# EAGLE board 190_Final.preroute (EAGLE 7.5.0)
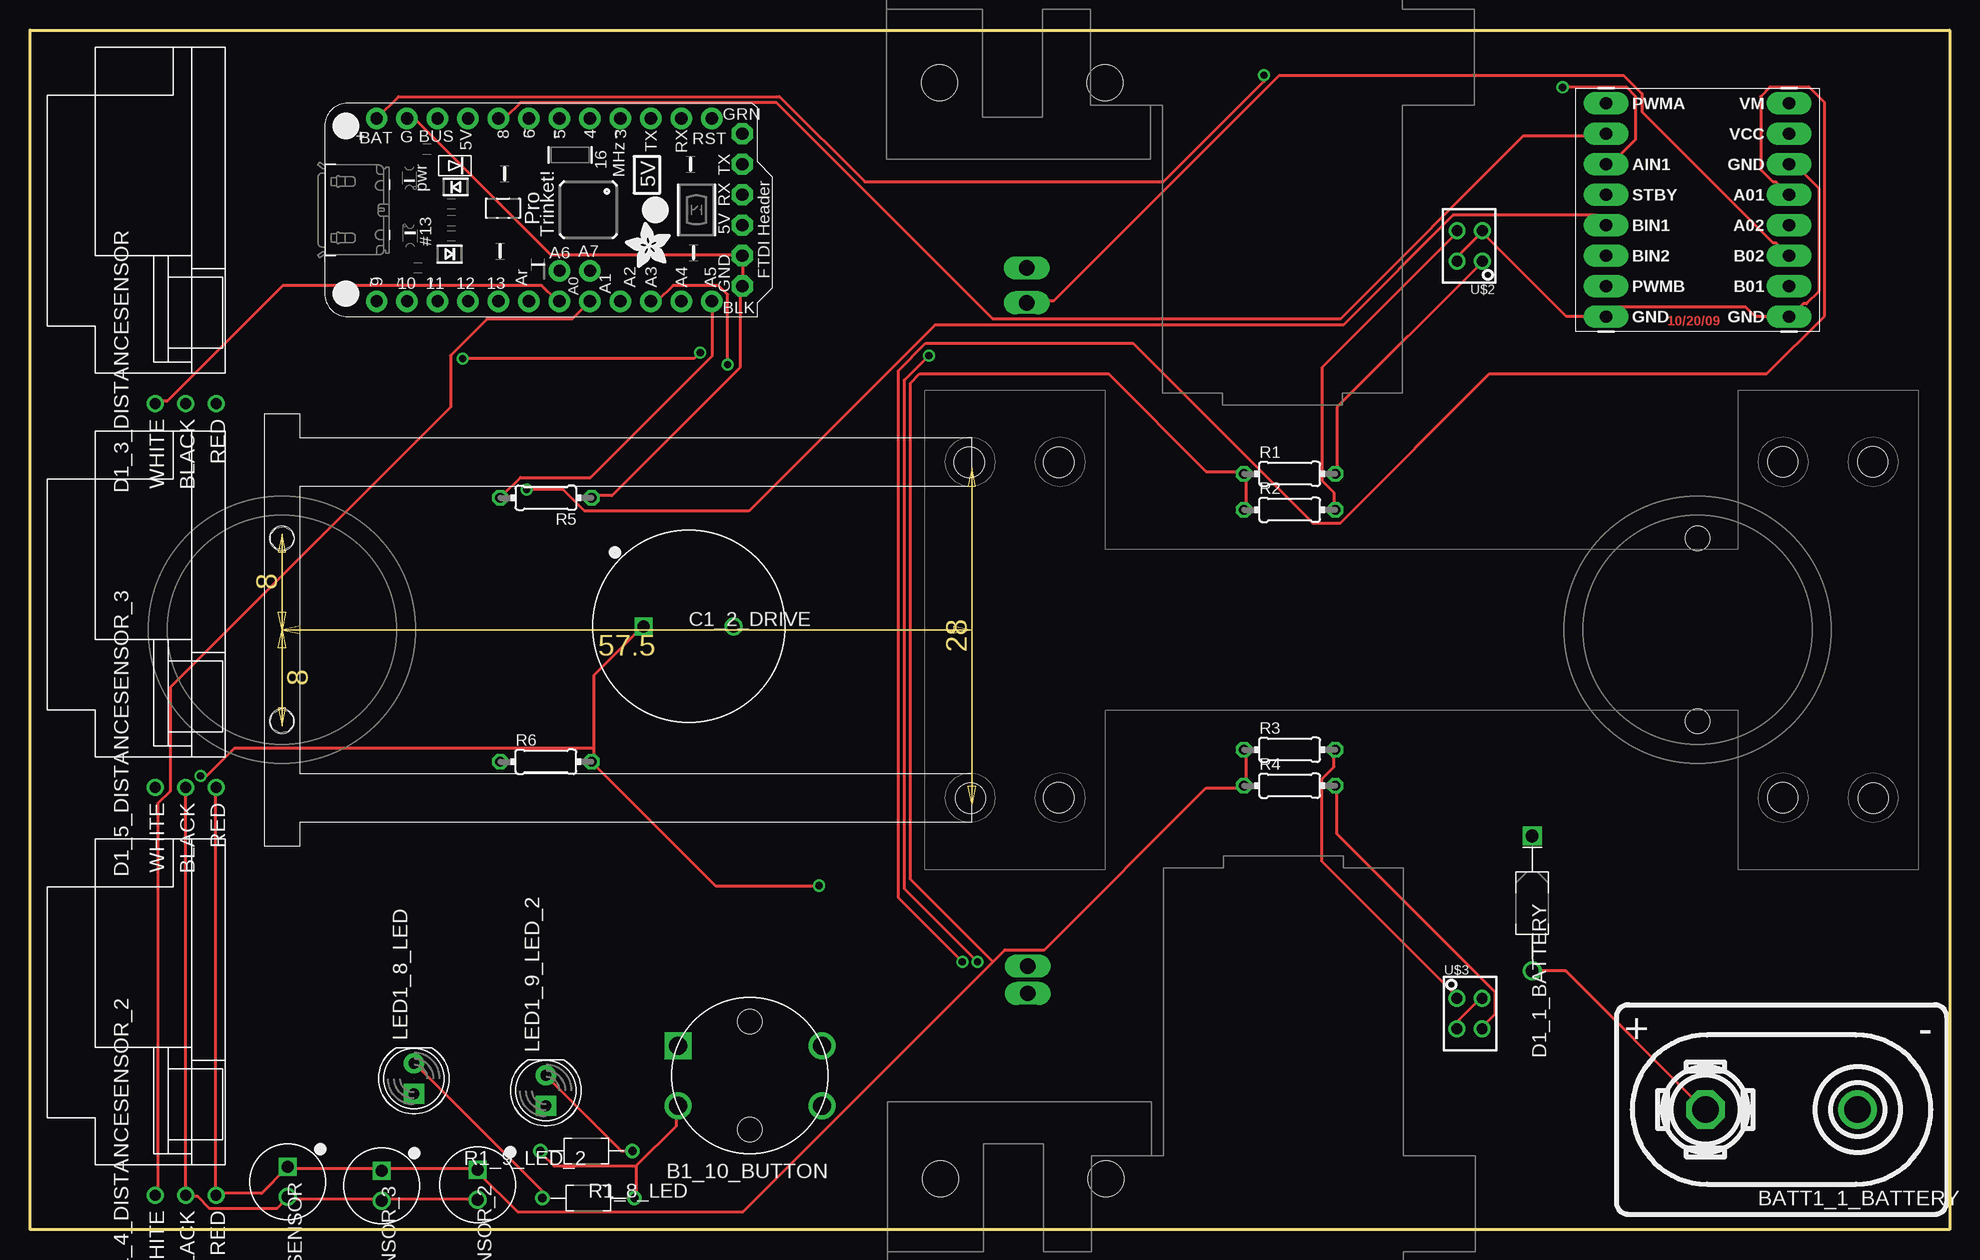
[diagram p0: board, top side]
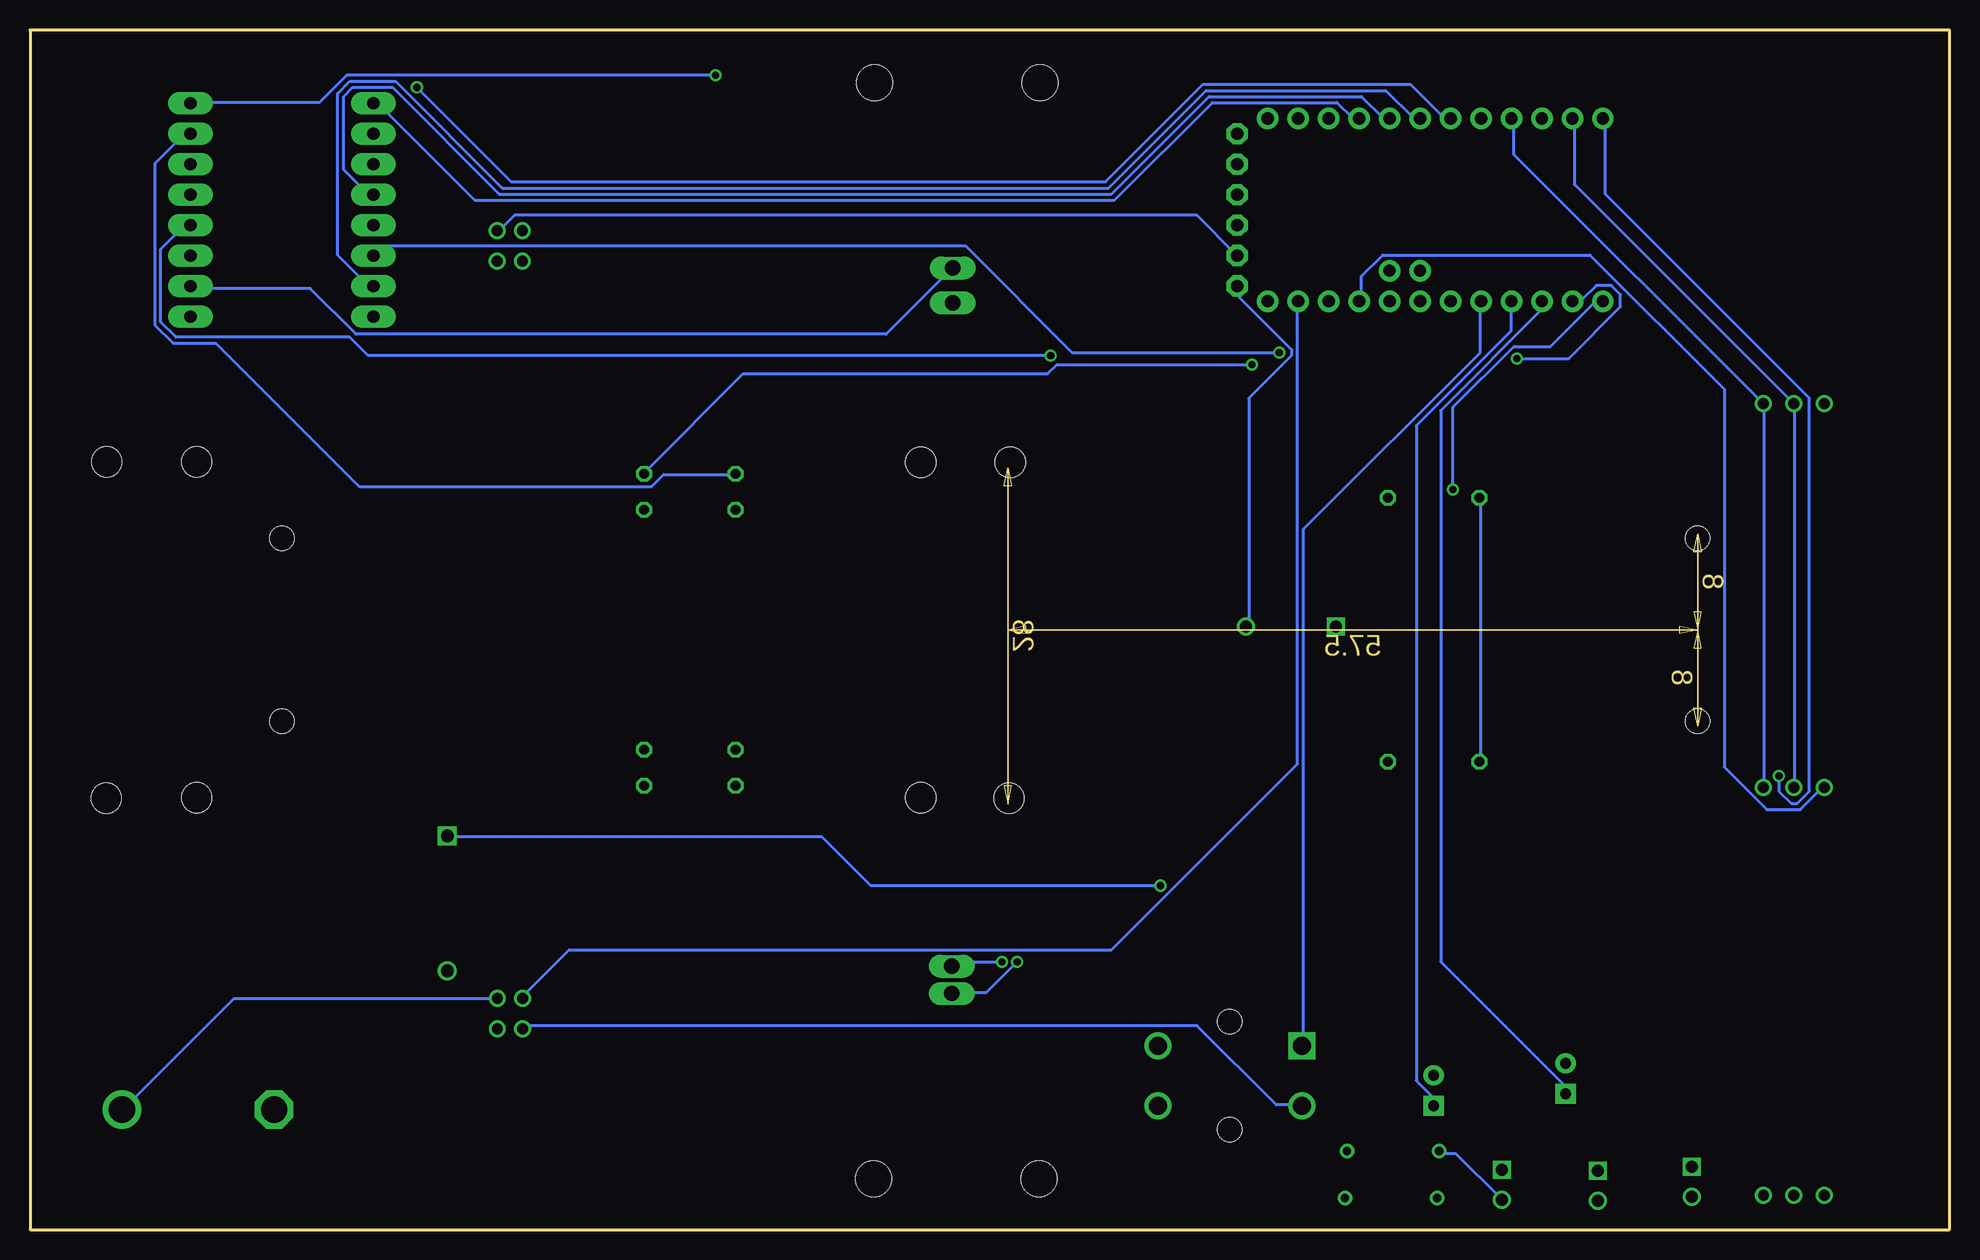
[diagram p1: board, bottom side, seen from below]

Size 160 x 100 mm. Coordinates in mm from the lower left corner, seen from the top.
Outline: 0,0 0,100 160,100 160,0 0,0
Copper layers (1*16): Top 0.035mm / dielectric 1.5mm / Bottom 0.035mm
Design rules "default *": minimum track width 10mil, minimum drill 0.6mm, track to track 10mil, track to pad 10mil, pad to pad 10mil, via to via 10mil, smd to smd 8mil, copper to edge 40mil, drill to drill 15mil, minimum pad ring 10mil, minimum via ring 8mil, stop-mask expansion 4mil, vias tented up to drill 0mil, thermal gap 10mil

## Footprints (pad centres in the part's own frame; a part is rotated, then mirrored left to right if it is on the bottom)
BUTTON-TACTILE-ROUND-ADAFRUIT1009 = drill 1.5 square: P -6,2.5 | drill 1.5: P2 6,2.5; S -6,-2.5; S2 6,-2.5 | hole 2: 0,-4.5; 0,4.5
BATTERY_9V_KEYSTONE_968 = drill 2.2: N 6.35,0 | drill 2.2 octagon: P -6.35,0
CAPPRD750W80D1600H2200P = drill 1 pad 1.5 square: 1 -3.75,0 | drill 1 pad 1.5: 2 3.75,0
CAPPRD250W80D630H1220P = drill 1 pad 1.5 square: 1 -1.25,0 | drill 1 pad 1.5: 2 1.25,0
DIOAD1125W78L520D270_HS = drill 1.06 pad 1.59: A 5.625,0 | drill 1.06 pad 1.59 square: C -5.625,0
ANALOG_DISTANCE_SENSOR_GLUE_MOUNT = drill 0.9: GND -2.54,0.508; VCC -2.54,-2.032; VO -2.54,3.048
SPARKFUN_DUAL_MOTOR_DRIVER = drill 1.016 pad 1.88 long: A01 7.62,1.27; A02 7.62,-1.27; AIN1 -7.62,3.81; AIN2 -7.62,6.35; B01 7.62,-6.35; B02 7.62,-3.81; BIN1 -7.62,-1.27; BIN2 -7.62,-3.81; GND -7.62,-8.89; GND1 7.62,3.81; GND2 7.62,-8.89; PWMA -7.62,8.89; PWMB -7.62,-6.35; STBY -7.62,1.27; VCC 7.62,6.35; VM 7.62,8.89
SOLARBOTICS_G2_LEFT = drill 1.27 long: + -40.545,-3.68; - -43.45,-3.68 | hole 3: -25.1,-10.2; -25.1,3.6
LED5MM = drill 0.9 pad 1.676 square: A -1.27,0 | drill 0.9 pad 1.676: K 1.27,0
0204/7 = drill 0.813 octagon: 1 -3.81,0; 2 3.81,0
RESAD770W45L370D210_HS = drill 0.7 pad 1.1: 1 -3.85,0; 2 3.85,0
SOLARBOTICS_G2 = drill 1.27 long: + 40.545,-3.68; - 42.815,-3.68 | hole 3: 25.1,-10.2; 25.1,3.6
ADAFRUIT-PRO-TRINKET-5V = drill 1.016 pad 1.778: +5V 7.62,24.13; A0 -7.62,16.51; A1 -7.62,13.97; A2 -7.62,11.43; A3 -7.62,8.89; A4 -7.62,6.35; A5 -7.62,3.81; AREF -7.62,19.05; D3 7.62,11.43; D4 7.62,13.97; D5 7.62,16.51; D6 7.62,19.05; D8 7.62,21.59; D9 -7.62,31.75; D10 -7.62,29.21; D11 -7.62,26.67; D12 -7.62,24.13; D13 -7.62,21.59; GND2 7.62,29.21; RESET 7.62,3.81; RXD1 7.62,6.35; TXD1 7.62,8.89; VBAT 7.62,31.75; VBUS1 7.62,26.67 | drill 1 pad 1.778: A6 -5.08,16.51; A7 -5.08,13.97 | drill 1.016 pad 1.778 octagon: DTR/RTS 6.35,1.27; GND -6.35,1.27; GND1 -3.81,1.27; RXD 1.27,1.27; TXD 3.81,1.27; VBUS -1.27,1.27
ADAFRUIT-3/4IN-CASTER = hole 2: -7.62,0; 7.62,0
PHONE_STAND = hole 2.5: -37.7,13.95; -30.25,13.95; -37.6,-14.05; -30.25,-14; 30.1,14; 37.6,14; 30.1,-14; 37.65,-14.05
QRD1114 = drill 0.9: 1 -1.067,1.27; 2 -1.067,-1.27; 3 1.041,-1.27; 4 1.041,1.27

## Placement (x,y rotation side)
B1_10_BUTTON  BUTTON-TACTILE-ROUND  [BUTTON-TACTILE-ROUND-ADAFRUIT1009]  60,12.83 0 top
BATT1_1_BATTERY  BATTERY-9V-VERTICAL  [BATTERY_9V_KEYSTONE_968]  146,10 0 top
C1_2_DRIVE  3300uF  [CAPPRD750W80D1600H2200P]  54.9,50.28 0 top
C1_3_DISTANCESENSOR  100uF  [CAPPRD250W80D630H1220P]  21.49,3.97 270 top
C1_4_DISTANCESENSOR_2  100uF  [CAPPRD250W80D630H1220P]  37.3,3.73 270 top
C1_5_DISTANCESENSOR_3  100uF  [CAPPRD250W80D630H1220P]  29.32,3.65 270 top
D1_1_BATTERY  [DIOAD1125W78L520D270_HS]  125.21,27.19 270 top
D1_3_DISTANCESENSOR  ANALOG_DISTANCE_SENSOR-GLUE  [ANALOG_DISTANCE_SENSOR_GLUE_MOUNT]  13.48,71.39 90 top
D1_4_DISTANCESENSOR_2  ANALOG_DISTANCE_SENSOR-GLUE  [ANALOG_DISTANCE_SENSOR_GLUE_MOUNT]  13.48,5.39 90 top
D1_5_DISTANCESENSOR_3  ANALOG_DISTANCE_SENSOR-GLUE  [ANALOG_DISTANCE_SENSOR_GLUE_MOUNT]  13.48,39.39 90 top
DRVR_2_DRIVE  SPARKFUN_DUAL_MOTOR_DRIVER-BOB  [SPARKFUN_DUAL_MOTOR_DRIVER]  139,85 0 top
L_2_DRIVE  SOLARBOTICS_GM2_LEFT  [SOLARBOTICS_G2_LEFT]  79.41,120.71 90 top
LED1_8_LED  [LED5MM]  32,12.58 90 top
LED1_9_LED_2  [LED5MM]  43,11.58 90 top
R1  [0204/7]  105,63 0 top
R1_8_LED  330  [RESAD770W45L370D210_HS]  46.54,2.62 0 top
R1_9_LED_2  330  [RESAD770W45L370D210_HS]  46.38,6.54 180 top
R2  [0204/7]  105,60 0 top
R3  [0204/7]  105,40 0 top
R4  [0204/7]  105,37 0 top
R5  [0204/7]  43,61 180 top
R6  [0204/7]  43,39 0 top
R_2_DRIVE  SOLARBOTICS_GM2  [SOLARBOTICS_G2]  79.49,-20.86 90 top
U1_0_BRAIN  ADAFRUIT-PRO-TRINKET-5V-BOB  [ADAFRUIT-PRO-TRINKET-5V]  60.64,85 90 top
U1_6_CASTER  CASTERADAFRUIT-3/4IN  [ADAFRUIT-3/4IN-CASTER]  21,50 90 top
U1_7_CASTER_2  CASTERADAFRUIT-3/4IN  [ADAFRUIT-3/4IN-CASTER]  139,50 90 top
U$1  [PHONE_STAND]  116,50 0 top
U$2  QRD1114  [QRD1114]  120,82 180 top
U$3  QRD1114  [QRD1114]  120,18 0 top
U$4  [IRSTAND]  21,50 0 top

## Library data of the parts
B1_10_BUTTON = Components; DIST: Adafruit; DISTPN: 1009; HIERARCHY_NAME: button.B1
BATT1_1_BATTERY = Components; HIERARCHY_NAME: battery.BATT1
C1_2_DRIVE = KoalaBuild; DATASHEET: http://industrial.panasonic.com/www-cgi/jvcr13pz.cgi?E+PZ+3+ABA0012+ECA1EM332+7+WW; DATA_SHEET: http://industrial.panasonic.com/www-cgi/jvcr13pz.cgi?E+PZ+3+ABA0012+ECA1EM332+7+WW; DB: /home/michael/gtron_devel/Gadgets/Tools/Koala/Koala/PartLibrary/Digikey/Capacitors-AluminumTH.csv; DEVICE: TH-RADIAL_ALUMINUM_16MM; DIST: Digikey; DISTPN: P5158-ND; HIERARCHY_NAME: drive.C1; IMAGE: http://media.digikey.com/Photos/Panasonic%20Photos/ECA-1CM472.jpg; MFR: Panasonic Electronic Components; MIN_QTY: 1; MPN: ECA-1EM332; PACKAGE: CAPPRD750W80D1600H2200P; PRICE: $1.13; SIZE: TH; STOCK: STOCK; TOL: 20%; VALUE_QUERY: >3000uF; VOLTS: ( >= 5)V
C1_3_DISTANCESENSOR = KoalaBuild; DATASHEET: http://industrial.panasonic.com/www-cgi/jvcr13pz.cgi?E+PZ+3+ABA0012+ECA1EM101+7+WW; DATA_SHEET: http://industrial.panasonic.com/www-cgi/jvcr13pz.cgi?E+PZ+3+ABA0012+ECA1EM101+7+WW; DB: /home/michael/gtron_devel/Gadgets/Tools/Koala/Koala/PartLibrary/Digikey/Capacitors-AluminumTH.csv; DEVICE: TH-RADIAL_ALUMINUM_6.3MM; DIST: Digikey; DISTPN: P5152-ND; HIERARCHY_NAME: distanceSensor.C1; IMAGE: http://media.digikey.com/Photos/Panasonic%20Photos/ECA-1EM101B.JPG; MFR: Panasonic Electronic Components; MIN_QTY: 1; MPN: ECA-1EM101; PACKAGE: CAPPRD250W80D630H1220P; PRICE: $0.25; SIZE: TH; STOCK: STOCK; TOL: 20%; VALUE_QUERY: >10uF; VOLTS: ( >= 5)V
C1_4_DISTANCESENSOR_2 = KoalaBuild; DATASHEET: http://industrial.panasonic.com/www-cgi/jvcr13pz.cgi?E+PZ+3+ABA0012+ECA1EM101+7+WW; DATA_SHEET: http://industrial.panasonic.com/www-cgi/jvcr13pz.cgi?E+PZ+3+ABA0012+ECA1EM101+7+WW; DB: /home/michael/gtron_devel/Gadgets/Tools/Koala/Koala/PartLibrary/Digikey/Capacitors-AluminumTH.csv; DEVICE: TH-RADIAL_ALUMINUM_6.3MM; DIST: Digikey; DISTPN: P5152-ND; HIERARCHY_NAME: distanceSensor_2.C1; IMAGE: http://media.digikey.com/Photos/Panasonic%20Photos/ECA-1EM101B.JPG; MFR: Panasonic Electronic Components; MIN_QTY: 1; MPN: ECA-1EM101; PACKAGE: CAPPRD250W80D630H1220P; PRICE: $0.25; SIZE: TH; STOCK: STOCK; TOL: 20%; VALUE_QUERY: >10uF; VOLTS: ( >= 5)V
C1_5_DISTANCESENSOR_3 = KoalaBuild; DATASHEET: http://industrial.panasonic.com/www-cgi/jvcr13pz.cgi?E+PZ+3+ABA0012+ECA1EM101+7+WW; DATA_SHEET: http://industrial.panasonic.com/www-cgi/jvcr13pz.cgi?E+PZ+3+ABA0012+ECA1EM101+7+WW; DB: /home/michael/gtron_devel/Gadgets/Tools/Koala/Koala/PartLibrary/Digikey/Capacitors-AluminumTH.csv; DEVICE: TH-RADIAL_ALUMINUM_6.3MM; DIST: Digikey; DISTPN: P5152-ND; HIERARCHY_NAME: distanceSensor_3.C1; IMAGE: http://media.digikey.com/Photos/Panasonic%20Photos/ECA-1EM101B.JPG; MFR: Panasonic Electronic Components; MIN_QTY: 1; MPN: ECA-1EM101; PACKAGE: CAPPRD250W80D630H1220P; PRICE: $0.25; SIZE: TH; STOCK: STOCK; TOL: 20%; VALUE_QUERY: >10uF; VOLTS: ( >= 5)V
D1_1_BATTERY = KoalaBuild; DATASHEET: http://www.st.com/web/en/resource/technical/document/datasheet/CD00001625.pdf; DATA_SHEET: http://www.st.com/web/en/resource/technical/document/datasheet/CD00001625.pdf; DB: /home/michael/gtron_devel/Gadgets/Tools/Koala/Koala/PartLibrary/Digikey/Schottky-Diodes-TH.csv; DEVICE: TH-DO-41-AND-DO-204AL; DIST: Digikey; DISTPN: 497-4547-1-ND; HIERARCHY_NAME: battery.D1; IMAGE: http://media.digikey.com/photos/STMicro%20Photos/1N5819.JPG; IRECT: 1A; MFR: STMicroelectronics; MIN_QTY: 1; MPN: 1N5817; PACKAGE: DIOAD1125W78L520D270_HS; PRICE: $0.57; SIZE: TH; STOCK: STOCK; VALUE: 450mV; VREV: 20V
D1_3_DISTANCESENSOR = Components; DIST: Pololu; DISTPN: 2450; HIERARCHY_NAME: distanceSensor.D1
D1_4_DISTANCESENSOR_2 = Components; DIST: Pololu; DISTPN: 2450; HIERARCHY_NAME: distanceSensor_2.D1
D1_5_DISTANCESENSOR_3 = Components; DIST: Pololu; DISTPN: 2450; HIERARCHY_NAME: distanceSensor_3.D1
DRVR_2_DRIVE = BOBs; DIST: Sparkfun; DISTPN: 9457; HIERARCHY_NAME: drive.DRVR
L_2_DRIVE = Components; DIST: Solarbotics; DISTPN: gm2; HIERARCHY_NAME: drive.L
LED1_8_LED = Components; DIST: Adafruit; DISTPN: 298; HIERARCHY_NAME: led.LED1
LED1_9_LED_2 = Components; DIST: Adafruit; DISTPN: 298; HIERARCHY_NAME: led_2.LED1
R1-R6 = resistor
R1_8_LED = KoalaBuild; CASE: TH; DATASHEET: http://www.yageo.com/NewPortal/yageodocoutput?fileName=/pdf/throughhole/Yageo_LR_CFR_2013.pdf; DATA_SHEET: http://www.yageo.com/NewPortal/yageodocoutput?fileName=/pdf/throughhole/Yageo_LR_CFR_2013.pdf; DB: /home/michael/gtron_devel/Gadgets/Tools/Koala/Koala/PartLibrary/Digikey/Resistors-TH.csv; DEVICE: TH-1/6W-CARBON; DIST: Digikey; DISTPN: 330EBK-ND; HIERARCHY_NAME: led.R1; IMAGE: http://media.digikey.com/Renders/Yageo%20Renders/CFR-12JR-330R.jpg; MFR: Yageo; MIN_QTY: 1; MPN: CFR-12JB-52-330R; PACKAGE: RESAD770W45L370D210_HS; PRICE: $0.10; PWR: 167mW; SIZE: TH; STOCK: STOCK; TOL: 5%; VALUE_QUERY: 330
R1_9_LED_2 = KoalaBuild; CASE: TH; DATASHEET: http://www.yageo.com/NewPortal/yageodocoutput?fileName=/pdf/throughhole/Yageo_LR_CFR_2013.pdf; DATA_SHEET: http://www.yageo.com/NewPortal/yageodocoutput?fileName=/pdf/throughhole/Yageo_LR_CFR_2013.pdf; DB: /home/michael/gtron_devel/Gadgets/Tools/Koala/Koala/PartLibrary/Digikey/Resistors-TH.csv; DEVICE: TH-1/6W-CARBON; DIST: Digikey; DISTPN: 330EBK-ND; HIERARCHY_NAME: led_2.R1; IMAGE: http://media.digikey.com/Renders/Yageo%20Renders/CFR-12JR-330R.jpg; MFR: Yageo; MIN_QTY: 1; MPN: CFR-12JB-52-330R; PACKAGE: RESAD770W45L370D210_HS; PRICE: $0.10; PWR: 167mW; SIZE: TH; STOCK: STOCK; TOL: 5%; VALUE_QUERY: 330
R_2_DRIVE = Components; DIST: Solarbotics; DISTPN: gm2; HIERARCHY_NAME: drive.R
U1_0_BRAIN = BOBs; DIST: Adafruit; DISTPN: 2000; HIERARCHY_NAME: brain.U1
U1_6_CASTER = Components; DIST: Adafruit; DISTPN: 1200; HIERARCHY_NAME: caster.u1
U1_7_CASTER_2 = Components; DIST: Adafruit; DISTPN: 1200; HIERARCHY_NAME: caster_2.u1
U$1 U$4 = 3DPrintedParts
U$2 U$3 = SparkFun-Sensors

## Nets
+5V_0_BRAIN: C1_3_DISTANCESENSOR.1 C1_4_DISTANCESENSOR_2.1 C1_5_DISTANCESENSOR_3.1 D1_3_DISTANCESENSOR.VCC D1_4_DISTANCESENSOR_2.VCC D1_5_DISTANCESENSOR_3.VCC DRVR_2_DRIVE.VCC R1.1 R2.1 R3.1 R4.1 U1_0_BRAIN.+5V
A0_0_BRAIN: D1_3_DISTANCESENSOR.VO U1_0_BRAIN.A0
A1_0_BRAIN: D1_4_DISTANCESENSOR_2.VO U1_0_BRAIN.A1
A01_2_DRIVE: DRVR_2_DRIVE.A01 R_2_DRIVE.+
A2_0_BRAIN: D1_5_DISTANCESENSOR_3.VO U1_0_BRAIN.A2
A02_2_DRIVE: DRVR_2_DRIVE.A02 R_2_DRIVE.-
A3_0_BRAIN: R1.2 U1_0_BRAIN.A3 U$2.1
A4_0_BRAIN: R3.2 U1_0_BRAIN.A4 U$3.1
A5_0_BRAIN: R5.2 R6.1 U1_0_BRAIN.A5
A6_0_BRAIN: U1_0_BRAIN.A6
A7_0_BRAIN: U1_0_BRAIN.A7
AREF_0_BRAIN: U1_0_BRAIN.AREF
B01_2_DRIVE: DRVR_2_DRIVE.B01 L_2_DRIVE.+
B02_2_DRIVE: DRVR_2_DRIVE.B02 L_2_DRIVE.-
D3_0_BRAIN: DRVR_2_DRIVE.PWMA U1_0_BRAIN.D3
D4_0_BRAIN: DRVR_2_DRIVE.STBY U1_0_BRAIN.D4
D5_0_BRAIN: DRVR_2_DRIVE.PWMB U1_0_BRAIN.D5
D6_0_BRAIN: DRVR_2_DRIVE.AIN1 U1_0_BRAIN.D6
D8_0_BRAIN: DRVR_2_DRIVE.AIN2 U1_0_BRAIN.D8
D9_0_BRAIN: DRVR_2_DRIVE.BIN1 U1_0_BRAIN.D9
D10_0_BRAIN: DRVR_2_DRIVE.BIN2 U1_0_BRAIN.D10
D11_0_BRAIN: LED1_8_LED.A U1_0_BRAIN.D11
D12_0_BRAIN: LED1_9_LED_2.A U1_0_BRAIN.D12
D13_0_BRAIN: B1_10_BUTTON.P U1_0_BRAIN.D13
DTR/RTS_0_BRAIN: U1_0_BRAIN.DTR/RTS
GND_0_BRAIN: B1_10_BUTTON.S BATT1_1_BATTERY.N C1_2_DRIVE.2 C1_3_DISTANCESENSOR.2 C1_4_DISTANCESENSOR_2.2 C1_5_DISTANCESENSOR_3.2 D1_3_DISTANCESENSOR.GND D1_4_DISTANCESENSOR_2.GND D1_5_DISTANCESENSOR_3.GND DRVR_2_DRIVE.GND DRVR_2_DRIVE.GND1 DRVR_2_DRIVE.GND2 R1_8_LED.2 R1_9_LED_2.2 R5.1 U1_0_BRAIN.GND U1_0_BRAIN.GND1 U1_0_BRAIN.GND2 U$2.2 U$2.4 U$3.2 U$3.4
N$1_1_BATTERY: BATT1_1_BATTERY.P D1_1_BATTERY.A
N$1_8_LED: LED1_8_LED.K R1_8_LED.1
N$1_9_LED_2: LED1_9_LED_2.K R1_9_LED_2.1
N$5: R2.2 U$2.3
N$7: R4.2 U$3.3
POS_1_BATTERY: C1_2_DRIVE.1 D1_1_BATTERY.C DRVR_2_DRIVE.VM R6.2 U1_0_BRAIN.VBAT
RESET_0_BRAIN: U1_0_BRAIN.RESET
RXD1_0_BRAIN: U1_0_BRAIN.RXD1
RXD_0_BRAIN: U1_0_BRAIN.RXD
TXD1_0_BRAIN: U1_0_BRAIN.TXD1
TXD_0_BRAIN: U1_0_BRAIN.TXD
VBUS1_0_BRAIN: U1_0_BRAIN.VBUS1
VBUS_0_BRAIN: U1_0_BRAIN.VBUS

## Tracks (layer width: path | path; a pad name or v marks a point on that pad's centre or on a via)
+5V_0_BRAIN
  Top 0.254: R2.1 101.34,60.16 101.34,62.95 R1.1 101.08,63.21 98.03,63.21 89.91,71.34 74.16,71.34 73.4,70.57 73.4,29.17 80.25,22.31 | R3.1 101.34,39.84 101.34,37.05 R4.1 101.08,36.79 98.03,36.79 84.57,23.33 81.27,23.33 80.25,22.31 | 80.25,22.31 59.43,1.49 40.63,1.49 37.33,4.79 C1_4_DISTANCESENSOR_2.1 37.07,5.04 29.45,5.04 C1_5_DISTANCESENSOR_3.1 29.2,5.04 21.58,5.04 C1_3_DISTANCESENSOR.1 21.33,5.04 19.29,3.01 15.74,3.01 D1_4_DISTANCESENSOR_2.VCC 15.48,3.01 15.48,36.79 D1_5_DISTANCESENSOR_3.VCC
  Bottom 0.254: R1.1 101.34,62.95 107.18,62.95 108.19,61.94 132.58,61.94 144.52,73.88 148.07,73.88 149.6,75.4 149.6,88.86 147.31,91.15 146.8,91.15 DRVR_2_DRIVE.VCC | D1_5_DISTANCESENSOR_3.VCC 15.48,37.05 15.48,68.8 D1_3_DISTANCESENSOR.VCC 15.74,69.05 36.31,89.62 36.31,92.42 U1_0_BRAIN.+5V
A0_0_BRAIN
  Top 0.254: D1_3_DISTANCESENSOR.VO 10.66,69.05 11.42,69.05 21.07,78.7 42.66,78.7 43.93,77.43 U1_0_BRAIN.A0
A1_0_BRAIN
  Top 0.254: D1_4_DISTANCESENSOR_2.VO 10.66,3.01 10.66,35.52 11.67,36.54 11.67,45.17 35.04,68.54 35.04,72.86 38.09,75.91 45.2,75.91 46.47,77.18 U1_0_BRAIN.A1
A01_2_DRIVE  (via drill 0.6)
  Top 0.254: v77.71,22.31 72.38,27.65 72.38,71.59 74.67,73.88 91.94,73.88 106.92,58.89 109.21,58.89 121.66,71.34 144.77,71.34 149.6,76.16 149.6,93.94 148.33,95.21 145.02,95.21 144.26,94.45 144.26,88.35 145.28,87.34 145.53,87.34 146.55,86.32 DRVR_2_DRIVE.A01
  Bottom 0.254: v77.71,22.31 80.25,19.77 83.05,19.77 R_2_DRIVE.+
A2_0_BRAIN
  Bottom 0.254: D1_5_DISTANCESENSOR_3.VO 10.66,36.79 12.44,35.01 15.23,35.01 18.79,38.57 18.79,70.07 29.96,81.24 47.23,81.24 49.01,79.46 49.01,77.43 U1_0_BRAIN.A2
A02_2_DRIVE  (via drill 0.6)
  Top 0.254: v74.92,72.86 72.89,70.83 72.89,28.41 v78.98,22.31
  Bottom 0.254: v74.92,72.86 131.82,72.86 133.34,74.38 147.82,74.38 149.09,75.65 149.09,81.75 147.31,83.53 146.8,83.53 DRVR_2_DRIVE.A02 | v78.98,22.31 82.79,22.31 83.05,22.06 R_2_DRIVE.-
A3_0_BRAIN  (via drill 0.6)
  Top 0.254: R1.2 108.96,63.21 108.96,68.54 120.89,80.48 U$2.1 | v58.16,72.1 58.16,77.94 57.39,78.7 53.58,78.7 52.31,77.43 51.81,77.43 U1_0_BRAIN.A3
  Bottom 0.254: v58.16,72.1 74.41,72.1 75.17,71.34 100.57,71.34 108.7,63.21 R1.2
A4_0_BRAIN
  Top 0.254: R3.2 108.7,39.84 108.7,38.57 107.69,37.55 107.69,30.7 118.86,19.52 U$3.1
  Bottom 0.254: U1_0_BRAIN.A4 54.35,77.18 54.35,38.82 69.84,23.33 115.05,23.33 118.86,19.52 U$3.1
A5_0_BRAIN
  Top 0.254: U1_0_BRAIN.A5 56.89,77.18 56.89,72.86 46.73,62.7 40.88,62.7 39.36,61.18 R5.2
  Bottom 0.254: R6.1 39.11,39.08 39.11,60.92 R5.2
B01_2_DRIVE
  Bottom 0.254: DRVR_2_DRIVE.B01 146.55,78.45 136.64,78.45 132.83,74.64 88.64,74.64 83.3,79.97 L_2_DRIVE.+
B02_2_DRIVE
  Top 0.254: DRVR_2_DRIVE.B02 146.55,81.24 145.53,82.26 145.28,82.26 134.36,93.18 134.36,94.7 132.83,96.23 104.13,96.23 85.33,77.43 83.3,77.43 L_2_DRIVE.-
D3_0_BRAIN
  Bottom 0.254: U1_0_BRAIN.D3 49.27,92.67 49.77,92.67 51.04,93.94 61.46,93.94 69.59,85.81 122.93,85.81 130.8,93.69 131.31,93.69 DRVR_2_DRIVE.PWMA
D4_0_BRAIN
  Bottom 0.254: U1_0_BRAIN.D4 46.73,92.67 47.23,92.67 49.01,94.45 61.71,94.45 69.84,86.32 120.89,86.32 129.78,95.21 133.09,95.21 133.85,94.45 133.85,88.35 131.56,86.07 DRVR_2_DRIVE.STBY
D5_0_BRAIN
  Bottom 0.254: U1_0_BRAIN.D5 44.19,92.67 44.69,92.67 46.98,94.96 61.97,94.96 70.09,86.83 120.64,86.83 129.53,95.72 133.34,95.72 134.36,94.7 134.36,81.24 131.56,78.45 DRVR_2_DRIVE.PWMB
D6_0_BRAIN  (via drill 0.6)
  Top 0.254: v127.75,95.21 133.09,95.21 133.85,94.45 133.85,90.89 131.56,88.61 DRVR_2_DRIVE.AIN1
  Bottom 0.254: v127.75,95.21 119.88,87.34 70.35,87.34 62.22,95.47 44.95,95.47 42.15,92.67 41.65,92.67 U1_0_BRAIN.D6
D8_0_BRAIN
  Top 0.254: U1_0_BRAIN.D8 39.11,92.67 39.61,92.67 40.88,93.94 62.22,93.94 80.25,75.91 109.21,75.91 124.45,91.15 131.31,91.15 DRVR_2_DRIVE.AIN2
D9_0_BRAIN  (via drill 0.6)
  Top 0.254: v41.39,61.68 44.44,61.68 46.22,59.91 59.93,59.91 75.43,75.4 109.46,75.4 118.61,84.54 130.55,84.54 131.31,83.78 DRVR_2_DRIVE.BIN1
  Bottom 0.254: v41.39,61.68 41.39,68.54 36.31,73.62 33.26,73.62 29.71,77.18 28.95,77.18 U1_0_BRAIN.D9
D10_0_BRAIN  (via drill 0.6)
  Top 0.254: v36.06,72.61 55.36,72.61 v55.87,73.11
  Bottom 0.254: v36.06,72.61 31.74,72.61 27.42,76.92 27.42,77.94 28.18,78.7 29.45,78.7 30.72,77.43 31.23,77.43 U1_0_BRAIN.D10 | v55.87,73.11 73.14,73.11 82.03,82 130.55,82 131.31,81.24 DRVR_2_DRIVE.BIN2
D11_0_BRAIN
  Bottom 0.254: LED1_8_LED.A 32.25,11.39 32.25,12.15 42.41,22.31 42.41,68.29 34.03,76.67 34.03,77.18 U1_0_BRAIN.D11
D12_0_BRAIN
  Bottom 0.254: LED1_9_LED_2.A 43.17,10.38 43.17,11.14 44.44,12.41 44.44,67.02 36.57,74.89 36.57,77.18 U1_0_BRAIN.D12
D13_0_BRAIN
  Bottom 0.254: U1_0_BRAIN.D13 39.11,77.18 39.11,73.11 53.84,58.38 53.84,15.46 B1_10_BUTTON.P
GND_0_BRAIN
  Top 0.254: U$3.2 119.12,16.98 119.12,17.49 120.89,19.27 U$3.4 | 50.54,5.3 50.54,2.76 R1_8_LED.2 | 50.54,5.3 53.84,8.6 53.84,10.12 B1_10_BUTTON.S | C1_4_DISTANCESENSOR_2.2 37.07,2.5 29.45,2.5 C1_5_DISTANCESENSOR_3.2 29.2,2.5 21.58,2.5 C1_3_DISTANCESENSOR.2 21.33,2.5 20.56,1.74 14.98,1.74 13.96,2.76 13.2,2.76 D1_4_DISTANCESENSOR_2.GND 12.94,3.01 12.94,36.79 D1_5_DISTANCESENSOR_3.GND | 50.54,5.3 43.68,5.3 42.66,6.31 R1_9_LED_2.2 | DRVR_2_DRIVE.GND1 146.8,88.61 147.31,88.61 149.09,86.83 149.09,78.19 148.07,77.18 147.82,77.18 146.8,76.16 DRVR_2_DRIVE.GND2 146.55,76.16 143.75,76.16 142.99,76.92 132.32,76.92 131.56,76.16 DRVR_2_DRIVE.GND 131.31,76.16 128.01,76.16 121.15,83.02 U$2.2 120.89,83.02 119.12,81.24 119.12,80.73 U$2.4 | R5.1 46.98,61.18 48.5,61.18 59.17,71.84 59.17,78.45 U1_0_BRAIN.GND 59.43,78.7 59.43,80.99 U1_0_BRAIN.GND1 59.17,81.24 43.42,81.24 32.25,92.42 31.49,92.42 U1_0_BRAIN.GND2
  Bottom 0.254: U$3.4 121.15,19.27 142.99,19.27 152.14,10.12 BATT1_1_BATTERY.N | R1_9_LED_2.2 42.41,6.31 41.14,6.31 37.33,2.5 C1_4_DISTANCESENSOR_2.2 | U$3.2 118.86,16.98 62.73,16.98 56.12,10.38 54.09,10.38 B1_10_BUTTON.S | D1_5_DISTANCESENSOR_3.GND 12.94,37.05 12.94,68.8 D1_3_DISTANCESENSOR.GND 13.2,69.05 31.23,87.08 31.23,92.42 U1_0_BRAIN.GND2 | C1_2_DRIVE.2 58.41,50.51 58.41,69.3 54.85,72.86 54.85,73.37 59.17,77.69 59.17,78.45 U1_0_BRAIN.GND | U$2.2 120.89,83.27 119.62,84.54 62.73,84.54 59.43,81.24 U1_0_BRAIN.GND1
N$1_1_BATTERY
  Top 0.254: D1_1_BATTERY.A 125.47,21.55 128.01,21.55 139.44,10.12 BATT1_1_BATTERY.P
N$1_8_LED
  Top 0.254: R1_8_LED.1 42.66,2.76 42.66,3.26 32.25,13.68 LED1_8_LED.K
N$1_9_LED_2
  Top 0.254: R1_9_LED_2.1 50.03,6.57 49.27,6.57 43.17,12.66 LED1_9_LED_2.K
N$5
  Top 0.254: R2.2 108.7,60.16 108.7,61.43 107.69,62.45 107.69,71.84 118.86,83.02 U$2.3
N$7
  Top 0.254: R4.2 108.96,36.79 108.96,32.98 122.16,19.77 122.16,18 121.15,16.98 U$3.3
POS_1_BATTERY  (via drill 0.6)
  Top 0.254: 46.98,40.09 46.98,46.19 51.04,50.25 C1_2_DRIVE.1 | 46.98,40.09 46.98,39.08 R6.2 46.98,38.82 57.14,28.66 v65.78,28.66 | v14.21,37.81 14.72,37.81 17.01,40.09 46.98,40.09 | v102.86,96.23 102.86,95.72 94.48,87.34 69.59,87.34 62.47,94.45 30.72,94.45 28.95,92.67 U1_0_BRAIN.VBAT
  Bottom 0.254: v65.78,28.66 89.91,28.66 93.97,32.73 125.21,32.73 D1_1_BATTERY.C | v14.21,37.81 14.21,36.54 13.2,35.52 12.69,35.52 11.67,36.54 11.67,69.3 28.69,86.32 28.69,92.42 U1_0_BRAIN.VBAT | v102.86,96.23 133.59,96.23 135.88,93.94 146.55,93.94 DRVR_2_DRIVE.VM